# Altium PCB SkayboardRev2.PcbDoc
Units mm, origin at the board's own origin, x right, y up, seen from the top; angles counter-clockwise.
Board outline 356.9 x 109.25 mm, 2 copper layers (Top Layer, Bottom Layer); 98 components, 111 nets, 874 pads, 0 vias.
Unrouted connection lines stored in the file: 445.
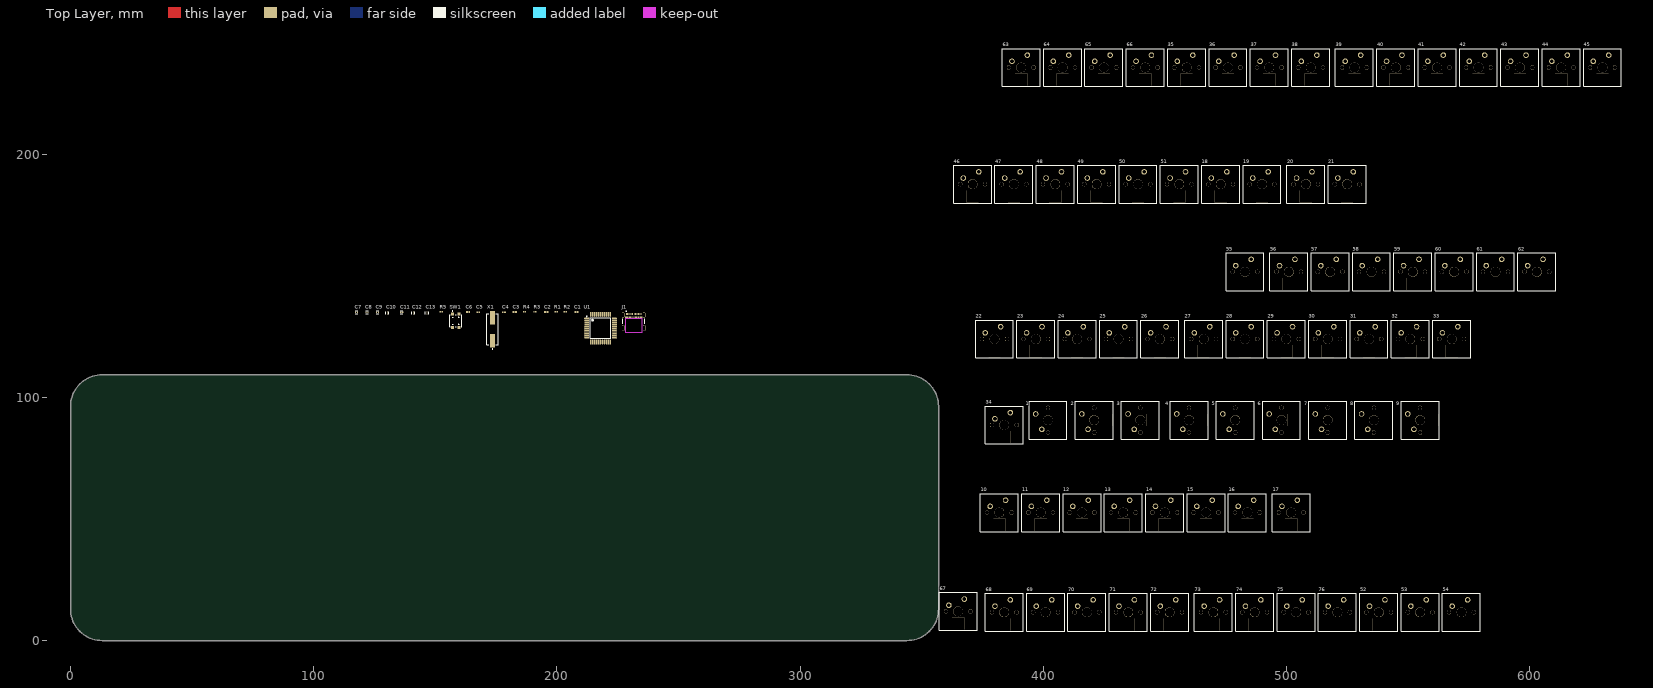
[diagram p0: Top Layer view]
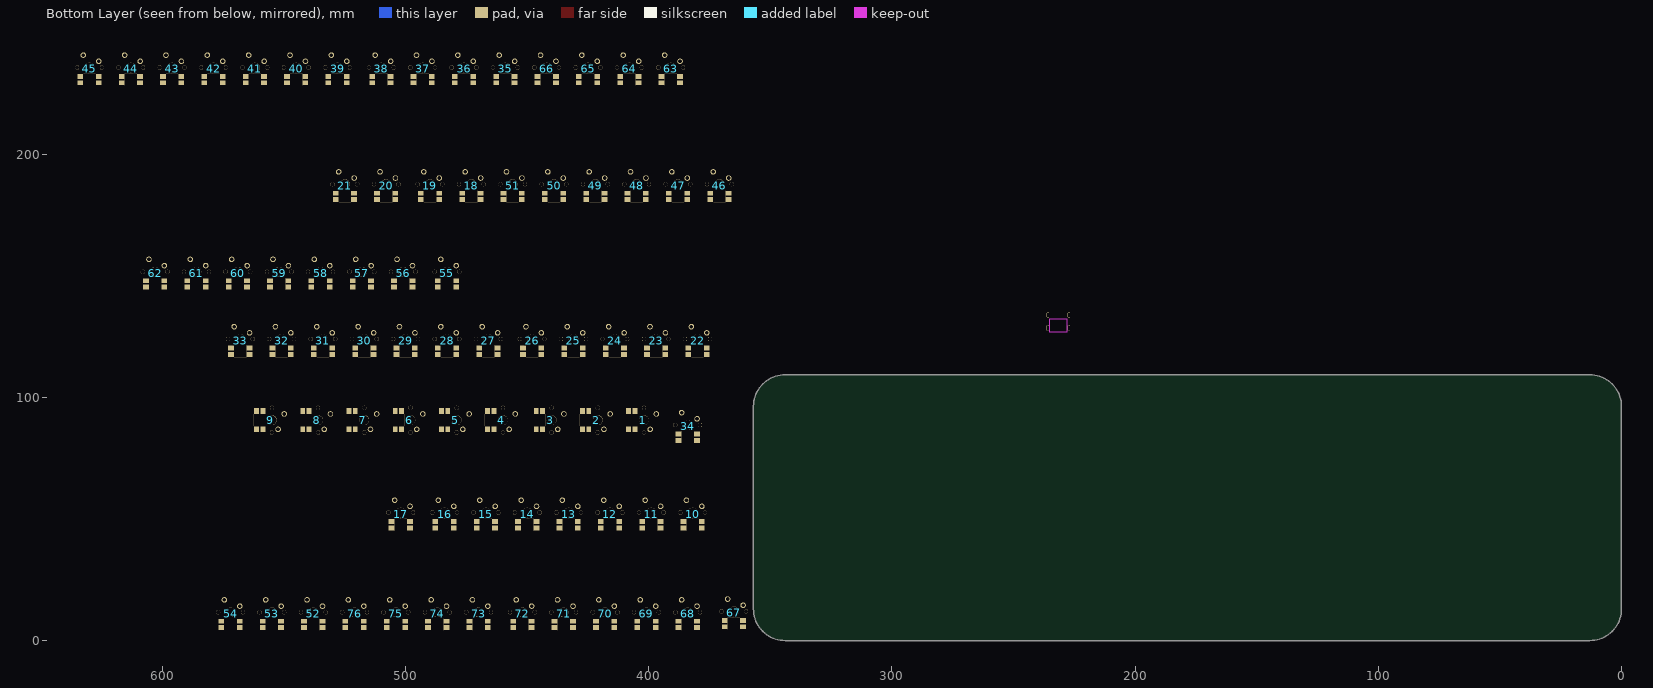
[diagram p1: Bottom Layer view, seen from below]

## Layer stack, top to bottom
Top Solder: solder mask 0.0102, Solder Resist, Dk 3.5
Top Layer: signal copper 0.0356
Dielectric 1: dielectric 0.32, FR-4, Dk 4.8
Bottom Layer: signal copper 0.0356
Bottom Solder: solder mask 0.0102, Solder Resist, Dk 3.5

## Board outline
1.437,7.116 1.01,8.044 0.657,9 0.38,9.984 0.18,10.984 0.06,11.999 0.02,13.018 0.02,96.268 0.06,97.288 0.18,98.303 0.38,99.303 0.657,100.287 1.01,101.243 1.437,102.17 1.936,103.061 2.502,103.911 3.134,104.712 3.828,105.461 4.577,106.154 5.378,106.787 6.228,107.353 7.118,107.852 8.046,108.279 9.002,108.632 9.986,108.909 10.986,109.109 12.001,109.229 13.02,109.269 343.922,109.269 344.94,109.229 345.954,109.109 346.955,108.909 347.939,108.632 348.895,108.279 349.823,107.852 350.713,107.353 351.563,106.787 352.364,106.154 353.112,105.461 353.807,104.712 354.438,103.911 355.006,103.061 355.504,102.17 355.931,101.243 356.283,100.287 356.562,99.303 356.76,98.303 356.88,97.288 356.922,96.268 356.922,13.018 356.88,11.999 356.76,10.984 356.562,9.984 356.283,9 355.931,8.044 355.504,7.116 355.006,6.226 354.438,5.376 353.807,4.575 353.112,3.825 352.364,3.132 351.563,2.5 350.713,1.933 349.823,1.435 348.895,1.007 347.939,0.655 346.955,0.378 345.954,0.178 344.94,0.058 343.922,0.018 13.02,0.018 12.001,0.058 10.986,0.178 9.986,0.378 9.002,0.655 8.046,1.007 7.118,1.435 6.228,1.933 5.378,2.5 4.577,3.132 3.828,3.825 3.134,4.575 2.502,5.376 1.936,6.226

## Design rules (kind name [scope] priority, off if disabled: settings)
Clearance [All] p1: gap=0.254 ignorepadtopadclearanceinfootprint=FALSE except(0: Arc-Hole Track-Hole SMDPad-Hole THPad-Hole Via-Hole Fill-Hole Poly-Hole Region-Hole Text-Hole)
PolygonConnect [All] p1: connectstyle=Relief reliefconductorwidth=0.254 reliefentries=4 polygonreliefangle="90 Angle" airgapwidth=0.254
RoutingVias [All] p1: holewidth=0.711 width=1.27 viastyle="Through Hole" minholewidth=0.711 minwidth=1.27 maxholewidth=0.711 maxwidth=1.27
SolderMaskExpansion [All] p1: expansion=0.102 istentingtop=FALSE
Width [All] p1: maxlimit=0.254 minlimit=0.254 preferedwidth=0.254
30 further rules are at their usual default settings.

## Components (designator, comment, footprint, x,y, rotation, side; value= is the part's Value field where it differs from the comment)
1 "Skey" Skey 401.926,90.65 r90 top
2 "Skey" Skey 420.926,90.65 r90 top
3 "Skey" Skey 439.926,90.65 r90 top
4 "Skey" Skey 459.926,90.65 r90 top
5 "Skey" Skey 478.926,90.65 r90 top
6 "Skey" Skey 497.926,90.65 r90 top
7 "Skey" Skey 516.926,90.65 r90 top
8 "Skey" Skey 535.926,90.65 r90 top
9 "Skey" Skey 554.926,90.65 r90 top
10 "Skey" Skey 381.926,52.65 r0 top
11 "Skey" Skey 398.926,52.65 r0 top
12 "Skey" Skey 415.926,52.65 r0 top
13 "Skey" Skey 432.926,52.65 r0 top
14 "Skey" Skey 449.926,52.65 r0 top
15 "Skey" Skey 466.926,52.65 r0 top
16 "Skey" Skey 483.926,52.65 r0 top
17 "Skey" Skey 501.926,52.65 r0 top
18 "Skey" Skey 472.926,187.65 r0 top
19 "Skey" Skey 489.926,187.65 r0 top
20 "Skey" Skey 507.926,187.65 r0 top
21 "Skey" Skey 524.926,187.65 r0 top
22 "Skey" Skey 379.92,124 r0 top
23 "Skey" Skey 396.92,124 r0 top
24 "Skey" Skey 413.92,124 r0 top
25 "Skey" Skey 430.92,124 r0 top
26 "Skey" Skey 447.92,124 r0 top
27 "Skey" Skey 465.92,124 r0 top
28 "Skey" Skey 482.92,124 r0 top
29 "Skey" Skey 499.92,124 r0 top
30 "Skey" Skey 516.92,124 r0 top
31 "Skey" Skey 533.92,124 r0 top
32 "Skey" Skey 550.92,124 r0 top
33 "Skey" Skey 567.92,124 r0 top
34 "Skey" Skey 383.926,88.65 r0 top
35 "Skey" Skey 458.925,235.65 r0 top
36 "Skey" Skey 475.925,235.65 r0 top
37 "Skey" Skey 492.925,235.65 r0 top
38 "Skey" Skey 509.925,235.65 r0 top
39 "Skey" Skey 527.925,235.65 r0 top
40 "Skey" Skey 544.925,235.65 r0 top
41 "Skey" Skey 561.925,235.65 r0 top
42 "Skey" Skey 578.925,235.65 r0 top
43 "Skey" Skey 595.926,235.65 r0 top
44 "Skey" Skey 612.926,235.65 r0 top
45 "Skey" Skey 629.926,235.65 r0 top
46 "Skey" Skey 370.926,187.65 r0 top
47 "Skey" Skey 387.926,187.65 r0 top
48 "Skey" Skey 404.926,187.65 r0 top
49 "Skey" Skey 421.926,187.65 r0 top
50 "Skey" Skey 438.926,187.65 r0 top
51 "Skey" Skey 455.926,187.65 r0 top
52 "Skey" Skey 537.925,11.65 r0 top
53 "Skey" Skey 554.925,11.65 r0 top
54 "Skey" Skey 571.925,11.65 r0 top
55 "Skey" Skey 482.925,151.65 r0 top
56 "Skey" Skey 500.925,151.65 r0 top
57 "Skey" Skey 517.925,151.65 r0 top
58 "Skey" Skey 534.925,151.65 r0 top
59 "Skey" Skey 551.925,151.65 r0 top
60 "Skey" Skey 568.925,151.65 r0 top
61 "Skey" Skey 585.925,151.65 r0 top
62 "Skey" Skey 602.925,151.65 r0 top
63 "Skey" Skey 390.925,235.65 r0 top
64 "Skey" Skey 407.925,235.65 r0 top
65 "Skey" Skey 424.925,235.65 r0 top
66 "Skey" Skey 441.925,235.65 r0 top
67 "Skey" Skey 365,12 r0 top
68 "Skey" Skey 383.925,11.65 r0 top
69 "Skey" Skey 400.925,11.65 r0 top
70 "Skey" Skey 417.925,11.65 r0 top
71 "Skey" Skey 434.925,11.65 r0 top
72 "Skey" Skey 451.925,11.65 r0 top
73 "Skey" Skey 469.925,11.65 r0 top
74 "Skey" Skey 486.925,11.65 r0 top
75 "Skey" Skey 503.925,11.65 r0 top
76 "Skey" Skey 520.925,11.65 r0 top
C1 "100nF" CAPC1050X55X23ML05T13 208.058,135.086 r0 top
C2 "47pF" CAPC1005X55X30ML05T10 195.612,135.086 r0 top
C3 "47pF" CAPC1005X55X30ML05T10 182.658,135.086 r0 top
C4 "22pF" CAPC1005X56X25NL10T15 178.213,135.086 r0 top
C5 "22pF" CAPC1005X56X25NL10T15 167.672,135.086 r0 top
C6 "100nF" CAPC1050X55X23ML05T13 163.481,135.086 r0 top
C7 "100nF" FP-C0402-BB-MFG 117.634,134.959 r0 top value="0.10 μF"
C8 "100nF" FP-C0402-BB-MFG 121.952,134.959 r0 top value="0.10 μF"
C9 "100nF" FP-C0402-BB-MFG 126.27,134.959 r0 top value="0.10 μF"
C10 "100nF" FP-C0402-BB-MFG 130.334,134.705 r90 top value="0.10 μF"
C11 "100nF" FP-C0402-BB-MFG 136.176,134.959 r0 top value="0.10 μF"
C12 "100nF" FP-C0402-BB-MFG 141.002,134.705 r90 top value="0.10 μF"
C13 "100nF" FP-C0402-BB-MFG 146.59,134.705 r90 top value="0.10 μF"
J1 "1054500101" FP-1054500101-MFG 231.553,130.514 r0 top
R1 "5.1K" RESC1005X40X25NL10T10 199.676,135.213 r0 top
R2 "5.1K" RESC1005X40X25NL10T10 203.486,135.213 r0 top
R3 "22R" RESC1005X40X25LL05T05 190.913,135.213 r0 top
R4 "22R" RESC1005X40X25LL05T05 186.595,135.213 r0 top
R5 "10K" RESC1005X40X25NL05T05 152.432,135.213 r0 top
SW1 "7914G-1-000E" BOUR-7914G-1-000E_V 158.401,131.53 r0 top
U1 "ATmega32U4-AU" 44ML_M 217.964,128.482 r0 top
X1 "ABLS-8.000MHZ-B4-T" ABRA-ABLS-14.7456MHZ-B2-T_V 173.514,127.974 r90 top

## Footprints (in the part's own frame and the unit in brackets; to place one, negate y for a bottom-side part, rotate by r counter-clockwise, add the part's x,y. Pads: shape width x height; smd on the part's side, far side on the other; paste and mask are expansions set on the pad)
44ML_M [mm] "Thin QFP, 44-Leads, Body 10x10mm, Pitch 0.8mm, IPC Low Density"
  oval 2.05x0.6 smd: 1(-5.7,4) 2(-5.7,3.2) 3(-5.7,2.4) 4(-5.7,1.6) 5(-5.7,0.8) 6(-5.7,0) 7(-5.7,-0.8) 8(-5.7,-1.6) 9(-5.7,-2.4) 10(-5.7,-3.2) 11(-5.7,-4) 23(5.7,-4) 24(5.7,-3.2) 25(5.7,-2.4) 26(5.7,-1.6) 27(5.7,-0.8) 28(5.7,0) 29(5.7,0.8) 30(5.7,1.6) 31(5.7,2.4) 32(5.7,3.2) 33(5.7,4)
  oval 0.6x2.05 smd: 12(-4,-5.7) 13(-3.2,-5.7) 14(-2.4,-5.7) 15(-1.6,-5.7) 16(-0.8,-5.7) 17(0,-5.7) 18(0.8,-5.7) 19(1.6,-5.7) 20(2.4,-5.7) 21(3.2,-5.7) 22(4,-5.7) 34(4,5.7) 35(3.2,5.7) 36(2.4,5.7) 37(1.6,5.7) 38(0.8,5.7) 39(0,5.7) 40(-0.8,5.7) 41(-1.6,5.7) 42(-2.4,5.7) 43(-3.2,5.7) 44(-4,5.7)
  silkscreen extent -5.82,-4.25 4.25,4.97, body extent -5,-5 5,5, height 1.2
ABRA-ABLS-14.7456MHZ-B2-T_V [mm] "SMD, 2-Leads, Body 11.4x4.7mm"
  rect 5.6x2.1 smd: 1(-4.75,0) 2(4.75,0)
  silkscreen extent -8.22,-2.35 6.35,2.35, body extent -6.35,-2.35 6.35,2.35, height 4.16
BOUR-7914G-1-000E_V [mm] "SMD, 4-Leads, Body 5x5mm, Height 4.49mm"
  rect 1.27x1.27 smd: 1(-1.27,2.75) 2(1.27,2.75) 3(1.27,-2.75) 4(-1.27,-2.75)
  silkscreen extent -2.5,-2.5 2.5,4.06, body extent -2.5,-3.1 2.5,3.1, height 4.11
CAPC1005X55X30ML05T10 [mm] "Chip Capacitor, 2-Leads, Body 1.00x0.50mm, IPC Low Density"
  rect 0.76x0.72 smd: 1(-0.48,0) 2(0.48,0)
  body extent -0.53,-0.28 0.53,0.27, height 0.55
CAPC1005X56X25NL10T15 [mm] "Chip Capacitor, 2-Leads, Body 1.00x0.50mm, IPC Medium Density"
  rect 0.68x0.64 smd: 1(-0.44,0) 2(0.44,0)
  body extent -0.55,-0.3 0.55,0.3, height 0.56
CAPC1050X55X23ML05T13 [mm] "Chip Capacitor, 2-Leads, Body 1.05x0.55mm, IPC Low Density"
  rect 0.76x0.72 smd: 1(-0.49,0) 2(0.49,0)
  body extent -0.53,-0.28 0.53,0.27, height 0.55
FP-1054500101-MFG [mm]
  rrect100% 1.1x2.1 hole 1.6 slot 0.6 at 0 deg paste-1000 mask+0: 1(-4.32,3.36) 2(4.32,3.36)
  rrect100% 1.1x2.6 hole 2.1 slot 0.6 at 0 deg paste-1000 mask+0: 3(-4.32,-2) 4(4.32,-2)
  rect 0.3x0.7 smd paste+0 mask+0: A1(-3,3.77) A2(-2.5,3.77) A3(-2,3.77) A4(-1.5,3.77) A5(-1,3.77) A6(-0.5,3.77) A7(0.5,3.77) A8(1,3.77) A9(1.5,3.77) A10(2,3.77) A11(2.5,3.77) A12(3,3.77) B2(2.25,2.47) B3(1.75,2.47) B4(1.25,2.47) B5(0.75,2.47) B6(0.25,2.47) B7(-0.25,2.47) B8(-0.75,2.47) B9(-1.25,2.47) B10(-1.75,2.47) B11(-2.25,2.47)
  rect 1x0.7 smd paste+0 mask+0: B1(3.1,2.47) B12(-3.1,2.47)
  Keep-Out Layer region: -3.5,-3.77 3.5,-3.77 3.5,1.88 -3.5,1.88
  silkscreen extent -4.57,-0.3 4.57,5.03
FP-C0402-BB-MFG [mm]
  rect 0.52x0.52 smd paste+0 mask+0: 1(-0.4,0) 2(0.4,0)
  silkscreen extent -0.5,-0.64 0.5,0.64, body extent -0.8,-0.4 0.8,0.4, height 0.25
RESC1005X40X25LL05T05 [mm] "Chip Resistor, 2-Leads, Body 1.00x0.50mm, IPC High Density"
  rect 0.45x0.45 smd: 1(-0.4,0) 2(0.4,0)
  body extent -0.53,-0.27 0.53,0.28, height 0.4
RESC1005X40X25NL05T05 [mm] "Chip Resistor, 2-Leads, Body 1.00x0.50mm, IPC Medium Density"
  rect 0.55x0.55 smd: 1(-0.45,0) 2(0.45,0)
  body extent -0.53,-0.27 0.53,0.28, height 0.4
RESC1005X40X25NL10T10 [mm] "Chip Resistor, 2-Leads, Body 1.00x0.50mm, IPC Medium Density"
  rect 0.65x0.6 smd: 1(-0.425,0) 2(0.425,0)
  body extent -0.55,-0.3 0.55,0.3, height 0.4
Skey [mm] "Skey's footprint"
  rect 2.5x2 smd far side: 1(-3.7,-3.7) 2(-3.7,-6.3) 3(3.7,-6.3) 4(3.7,-3.7)
  round 2.286 hole 1.499: 5(-3.81,2.54) 6(2.54,5.08)
  round 1.702 hole 1.702: ""(-5.08,0) ""(5.08,0)
  round 3.988 hole 3.988: ""(0,0)
  rect 5x5 hole 5 square: ""(0,-5)
  silkscreen extent -7.8,-7.8 7.8,7.8

## Part data
1 2 3 4 5 6 7 8 9 10 11 12 13 14 15 16 17 18 19 20 21 22 23 24 25 26 27 28 29 30 31 32 33 34 35 36 37 38 39 40 41 42 43 44 45 46 47 48 49 50 51 52 53 54 55 56 57 58 59 60 61 62 63 64 65 66 67 68 69 70 71 72 73 74 75 76: "Skaytacium's keyboard's key's symbol"
C1 C6: library part CMP-2000-05439-1, "Chip Capacitor, 100 nF, +/- 10%, 16 V, -55 to 125 degC, 0402 (1005 Metric), RoHS, Tape and Reel", Capacitance=100000pF, Case Size/Dimension=0402, Dielectric=X7R, Manufacturer="Samsung Electro-Mechanics", Rated Voltage=16V, Tolerance (%)=±10%, Datasheet URL=https://datasheet.ciiva.com/29198/458718-da-01-en-vs-kondensator-0402-29198423.pdf, Datasheet Version=Nov-10, Manufacturer URL=http://www.samsungsem.com/global/index.jsp
C2 C3: library part CMP-2008-03283-1, Manufacturer=Kemet, Part Number=C0402C470J5GACTU
C4 C5: library part CMP-2008-02613-1, Manufacturer="AVX Interconnect / Elco", Part Number=04025A220JAT2A
C7 C8 C9 C10 C11 C12 C13: library part CMP-03020-023811-1, "CAP CER 0.1UF 10V X5R 0402", Capacitance="0.10 μF", Manufacturer=Kemet, Manufacturer Part Number=C0402C104K8PACTU, Package=C0402-BB, Temperature="-55°C to +125°C", Temperature Characteristic=X5R, Temperature Coefficient=15%, Temperature Range High=+125°C, Temperature Range Low=-55°C, Tolerance=0.1, Voltage Rating="10 V", Automotive=No, Category=Cap, ComponentLink2Description=Datasheet, ComponentLink2URL=https://content.kemet.com/datasheets/KEM_C1002_X7R_SMD.pdf, Device Class L1="Passive Components", Device Class L2=Capacitors, Device Class L3="Ceramic Capacitors", Digikey Description="CAP CER 0.1UF 10V X5R 0402", Height=0.55mm, Ipc Land Pattern Name=CAPC10050X50, Lead Free=Yes, Material=Ceramic, Mouser Description="Capacitor 100 nF 10 VDC 0402", Octopart=https://octopart.com/c0402c104k8pactu-kemet-140039, RoHS=TRUE
J1: library part CMP-04767-000004-1, "CONN RCP USB3.1 TYPEC 24P SMD RA", Current Rating=0.25/1.25/5A, Manufacturer=Molex, Package=0, Temperature="-30°C to +85°C", Temperature Range High=+85°C, Temperature Range Low=-30°C, Voltage Rating=30V, Automotive=No, Category=Conn, ComponentLink2Description=Datasheet, ComponentLink2URL=https://www.molex.com/webdocs/datasheets/pdf/en-us/1054500101_IO_CONNECTORS.pdf, Conn Orientation="Right Angle", Contact Material=Gold,Nickel, Device Class L1=Connectors, Device Class L2="USB Connectors", Device Class L3=unset, Digikey Description="CONN RCP USB3.1 TYPEC 24P SMD RA", Footprint Url=https://www.molex.com/pdm_docs/sd/1054500101_sd.pdf, Height=3.44mm, Is Female=yes, Lead Free=Yes, Manufacturer Part Number=1054500101, Mouser Description="USB Shielded I/O Receptacle; Type C; Right Angle; Surface Mount; Gold over Nickel", Number Of Contacts=24, Octopart=https://octopart.com/105450-0101-molex-68082325, Pitch=0.5mm, RoHS=TRUE, Shielding=true, Usb Standard="USB 3.1"
R1 R2: library part CMP-2002-05812-1, Manufacturer=Panasonic, Part Number=ERA-2AEB512X
R3 R4: library part CMP-2002-08382-1, Manufacturer="Vishay Dale", Part Number=CRCW040222R0FKED
R5: library part CMP-2002-01183-1, Manufacturer=Panasonic, Part Number=ERT-J0ER103J
SW1: library part CMP-2000-05692-1, "SPST Gull Wing Sealed Key Switch, 100 mA, 16 V, -55 to 125 degC, 4-Pin SMD, RoHS, Tape and Reel", Actuator Color=N/A, Contact Rating @ Voltage=0.1A, Dielectric Strength=250VAC, Manufacturer=Bourns, Maximum AC Voltage Rating=16V, Maximum Contact Resistance=100mOhm, Minimum Insulation Resistance=100MOhm, Operating Force=2.94N, Operating Temperature=-55to125C, Package Description="4-Pin Surface Mount Device, Body 5 x 5 mm, Height 4.49 mm", Actuator Length=1.65mm, Actuator Style=RoundButton, Base Material=Thermoplastic, Body Orientation=Straight, Contact Material=Gold, Contact Plating=N/A, COO=TW, Datasheet URL=http://www.bourns.com/docs/Product-Datasheets/7914.pdf, Datasheet Version=08/2016, Dimension=5x6.2x4.19mm, ECCN=EAR99, Electrical Life=N/A, Family=7914, Ground Terminal=No, Housing Material=N/A, HTS=8536509065, Illumination Type=N/R, Manufacturer URL=http://www.bourns.com/, Maximum DC Voltage Rating=16V, Mechanical Life=100000Cycles, Mounting=SurfaceMount,GullWing, Mounting Technology=SurfaceMount, Package Reference=7914G-1-000E, Packaging=EmbossedTapeandReel, Part No=7914G-1-000E, Pole Throw Configuration=SPST, Product Weight=N/A, RoHS=Yes, Seal Description=N/A, Seal Location=N/A, Supplier=Bourns, Switch Configuration=N.O., Type=KeySwitch
U1: library part CMP-0095-00285-2, "8-bit AVR Microcontroller, 2.7-5.5V, 16MHz, 32KB Flash, 1KB EEPROM, 2.5KB SRAM, USB Controller, 44-pin TQFP, Industrial Grade (-40°C to 85°C), Ext Osc", ComponentLink1Description="Manufacturer URL", ComponentLink1URL=http://www.atmel.com/, ComponentLink2Description="ATmega16U4/32U4 Datasheet", ComponentLink2URL=http://www.atmel.com/dyn/resources/prod_documents/doc7766.pdf, ComponentLink3Description="ATmega16U4 ATmega32U4 Summary", ComponentLink3URL=http://www.atmel.com/dyn/resources/prod_documents/7766S.pdf, DatasheetVersion="revF, Nov-2010", PackageDescription="44-Pin Plastic Thin Quad Flat Pack, 10 x 10 x 1.0 mm Body, 0.8 mm Pitch (TQFP)", PackageReference=44ML, PackageVersion="rev.G, Jul-2007", RevisionNote="DatasheetVersion updated. URLs added."
X1: library part CMP-2000-05726-1, "Low Profile Crystal, 8.0 MHz, +/- 30 ppm, -20 to 70 degC, 2-Pin SMD, RoHS, Tape and Reel", Case Height=4.2mm, Case Length=11.4mm, Case Width=4.7mm, Frequency=8MHz, Frequency Stability=50PPM, Load Capacitance=18pF, Manufacturer=ABRACON, Operating Temperature Range=-20Cto+70C, Package / Case=HC-49/US, Package Description="2-Pin Surface Mount Device, Body 11.4 x 4.7 mm", Package Reference=ABLS-14.7456MHZ-B2-T, Tolerance=30PPM, Brand=ABRACON, Datasheet URL=http://www.abracon.com/Resonators/abls.pdf, Datasheet Version=04/2011, Dimensions=4.7mmWx11.4mmLx4.2mmH, ESR=80Ohms, Factory Pack Quantity=1000, Manufacturer URL=http://www.abracon.com/, Mounting Style=SMD/SMT, Mounting Technology=SurfaceMount, Package URL=http://www.abracon.com/Support/PackageDrawing/Resonators/ABLS-2D.pdf, Packaging=Reel, Product Category=Crystals, RoHS=Details, Series=ABLS, Termination Style=SMD/SMT, Type=LowProfileMicroprocessorCrystal

## Nets (pads, with @x,y where several pads share a name; then routed paths per layer and width w, separated by ;. In a path a pad name is that pad's centre, name@x,y a point inside that pad or via, vN(x,y) a via of type N, cw(c..) or ccw(c..) an arc to the next point about the centre after c; other vN are vias at no path point)
+5: C7.1 C8.1 C9.1 C10.1 C11.1 C12.1 C13.1 J1.A4 J1.A9 J1.B4 J1.B9 R5.1 U1.2 U1.6 U1.7 U1.14 U1.24 U1.34 U1.44
GND: 1.3 2.3 3.3 4.3 5.3 6.3 7.3 8.3 9.3 10.3 11.3 12.3 13.3 14.3 15.3 16.3 17.3 18.3 19.3 20.3 21.3 22.3 23.3 24.3 25.3 26.3 27.3 28.3 29.3 30.3 31.3 32.3 33.3 34.3 35.3 36.3 37.3 38.3 39.3 40.3 41.3 42.3 43.3 44.3 45.3 46.3 47.3 48.3 49.3 50.3 51.3 52.3 53.3 54.3 55.3 56.3 57.3 58.3 59.3 60.3 61.3 62.3 63.3 64.3 65.3 66.3 67.3 68.3 69.3 70.3 71.3 72.3 73.3 74.3 75.3 76.3 C1.1 C2.2 C3.1 C4.1 C5.1 C6.2 C7.2 C8.2 C9.2 C10.2 C11.2 C12.2 C13.2 J1.1 J1.2 J1.3 J1.4 J1.A1 J1.A12 J1.B1 J1.B12 R1.2 R2.2 SW1.2 SW1.3 U1.5 U1.15 U1.23 U1.35 U1.43
Net1_2: 1.2 18.4
Net1_4: 1.4 U1.8
Net1_5: 1.5 18.5 35.5 52.5 67.5 U1.29
Net1_6: 1.6 2.6 3.6 4.6 5.6 6.6 7.6 8.6 9.6 10.6 11.6 12.6 13.6 14.6 15.6 16.6 17.6 U1.27
Net2_2: 2.2 19.4
Net2_4: 2.4 67.2
Net2_5: 2.5 19.5 36.5 53.5 68.5 U1.30
Net3_2: 3.2 20.4
Net3_4: 3.4 68.2
Net3_5: 3.5 20.5 37.5 54.5 69.5 U1.12
Net4_2: 4.2 21.4
Net4_4: 4.4 69.2
Net4_5: 4.5 21.5 38.5 55.5 U1.31
Net5_2: 5.2 22.4
Net5_4: 5.4 55.2
Net5_5: 5.5 22.5 39.5 56.5 U1.32
Net6_2: 6.2 23.4
Net6_4: 6.4 56.2
Net6_5: 6.5 23.5 40.5 57.5 70.5 U1.33
Net7_2: 7.2 24.4
Net7_4: 7.4 70.2
Net7_5: 7.5 24.5 41.5 58.5 U1.1
Net8_2: 8.2 25.4
Net8_4: 8.4 58.2
Net8_5: 8.5 25.5 42.5 59.5 U1.36
Net9_2: 9.2 26.4
Net9_4: 9.4 59.2
Net9_5: 9.5 26.5 43.5 60.5 U1.37
Net10_2: 10.2 27.4
Net10_4: 10.4 60.2
Net10_5: 10.5 27.5 44.5 61.5 71.5 U1.38
Net11_2: 11.2 28.4
Net11_4: 11.4 71.2
Net11_5: 11.5 28.5 45.5 62.5 72.5 U1.39
Net12_2: 12.2 29.4
Net12_4: 12.4 72.2
Net12_5: 12.5 29.5 46.5 63.5 73.5 U1.18
Net13_2: 13.2 30.4
Net13_4: 13.4 73.2
Net13_5: 13.5 30.5 47.5 U1.19
Net14_2: 14.2 31.4
Net14_4: 14.4 47.2
Net14_5: 14.5 31.5 48.5 U1.20
Net15_2: 15.2 32.4
Net15_4: 15.4 48.2
Net15_5: 15.5 32.5 49.5 64.5 74.5 U1.21
Net16_2: 16.2 33.4
Net16_4: 16.4 74.2
Net16_5: 16.5 33.5 50.5 65.5 75.5 U1.25
Net17_2: 17.2 34.4
Net17_4: 17.4 75.2
Net17_5: 17.5 34.5 51.5 66.5 76.5 U1.22
Net18_2: 18.2 35.4
Net18_6: 18.6 19.6 20.6 21.6 22.6 23.6 24.6 25.6 26.6 27.6 28.6 29.6 30.6 31.6 32.6 33.6 34.6 U1.9
Net19_2: 19.2 36.4
Net20_2: 20.2 37.4
Net21_2: 21.2 38.4
Net22_2: 22.2 39.4
Net23_2: 23.2 40.4
Net24_2: 24.2 41.4
Net25_2: 25.2 42.4
Net26_2: 26.2 43.4
Net27_2: 27.2 44.4
Net28_2: 28.2 45.4
Net29_2: 29.2 46.4
Net30_2: 30.2 47.4
Net31_2: 31.2 48.4
Net32_2: 32.2 49.4
Net33_2: 33.2 50.4
Net34_2: 34.2 51.4
Net35_2: 35.2 52.4
Net35_6: 35.6 36.6 37.6 38.6 39.6 40.6 41.6 42.6 43.6 44.6 45.6 46.6 47.6 49.6 50.6 51.6 U1.10
Net36_2: 36.2 53.4
Net37_2: 37.2 54.4
Net38_2: 38.2 55.4
Net39_2: 39.2 56.4
Net40_2: 40.2 57.4
Net41_2: 41.2 58.4
Net42_2: 42.2 59.4
Net43_2: 43.2 60.4
Net44_2: 44.2 61.4
Net45_2: 45.2 62.4
Net46_2: 46.2 63.4
Net48_6: 48.6 67.6 68.6 69.6 70.6 71.6 72.6 73.6 74.6 75.6 76.6 U1.28
Net49_2: 49.2 64.4
Net50_2: 50.2 65.4
Net51_2: 51.2 66.4
Net52_2: 52.2 67.4
Net52_6: 52.6 53.6 54.6 55.6 56.6 57.6 58.6 59.6 60.6 61.6 62.6 63.6 64.6 65.6 66.6 U1.11
Net53_2: 53.2 68.4
Net54_2: 54.2 69.4
Net57_2: 57.2 70.4
Net61_2: 61.2 71.4
Net62_2: 62.2 72.4
Net63_2: 63.2 73.4
Net64_2: 64.2 74.4
Net65_2: 65.2 75.4
Net66_2: 66.2 76.4
NetC1_2: C1.2 U1.42
NetC2_1: C2.1 R3.1 U1.3
NetC3_2: C3.2 R4.1 U1.4
NetC4_2: C4.2 U1.16 X1.2
NetC5_2: C5.2 U1.17 X1.1
NetC6_1: C6.1 R5.2 SW1.1 SW1.4 U1.13
NetJ1_A5: J1.A5 R2.1
NetJ1_A6: J1.A6 J1.B6 R4.2
NetJ1_A7: J1.A7 J1.B7 R3.2
NetJ1_B5: J1.B5 R1.1
VCC: 1.1 2.1 3.1 4.1 5.1 6.1 7.1 8.1 9.1 10.1 11.1 12.1 13.1 14.1 15.1 16.1 17.1 18.1 19.1 20.1 21.1 22.1 23.1 24.1 25.1 26.1 27.1 28.1 29.1 30.1 31.1 32.1 33.1 34.1 35.1 36.1 37.1 38.1 39.1 40.1 41.1 42.1 43.1 44.1 45.1 46.1 47.1 48.1 49.1 50.1 51.1 52.1 53.1 54.1 55.1 56.1 57.1 58.1 59.1 60.1 61.1 62.1 63.1 64.1 65.1 66.1 67.1 68.1 69.1 70.1 71.1 72.1 73.1 74.1 75.1 76.1
pads on no net: 1. 2. 3. 4. 5. 6. 7. 8. 9. 10. 11. 12. 13. 14. 15. 16. 17. 18. 19. 20. 21. 22. 23. 24. 25. 26. 27. 28. 29. 30. 31. 32. 33. 34. 35. 36. 37. 38. 39. 40. 41. 42. 43. 44. 45. 46. 47. 48. 49. 50. 51. 52. 53. 54. 55. 56. 57. 58. 59. 60. 61. 62. 63. 64. 65. 66. 67. 68. 69. 70. 71. 72. 73. 74. 75. 76. 76.2 J1.A2 J1.A3 J1.A8 J1.A10 J1.A11 J1.B2 J1.B3 J1.B8 J1.B10 J1.B11 U1.26 U1.40 U1.41

## Silkscreen, mask and mechanical layers (free items; w line width, h text height)
Mechanical 1:
  drawing of 1764 lines, arcs and shapes, not listed